# EAGLE board MainPSU (EAGLE 9.5.1)
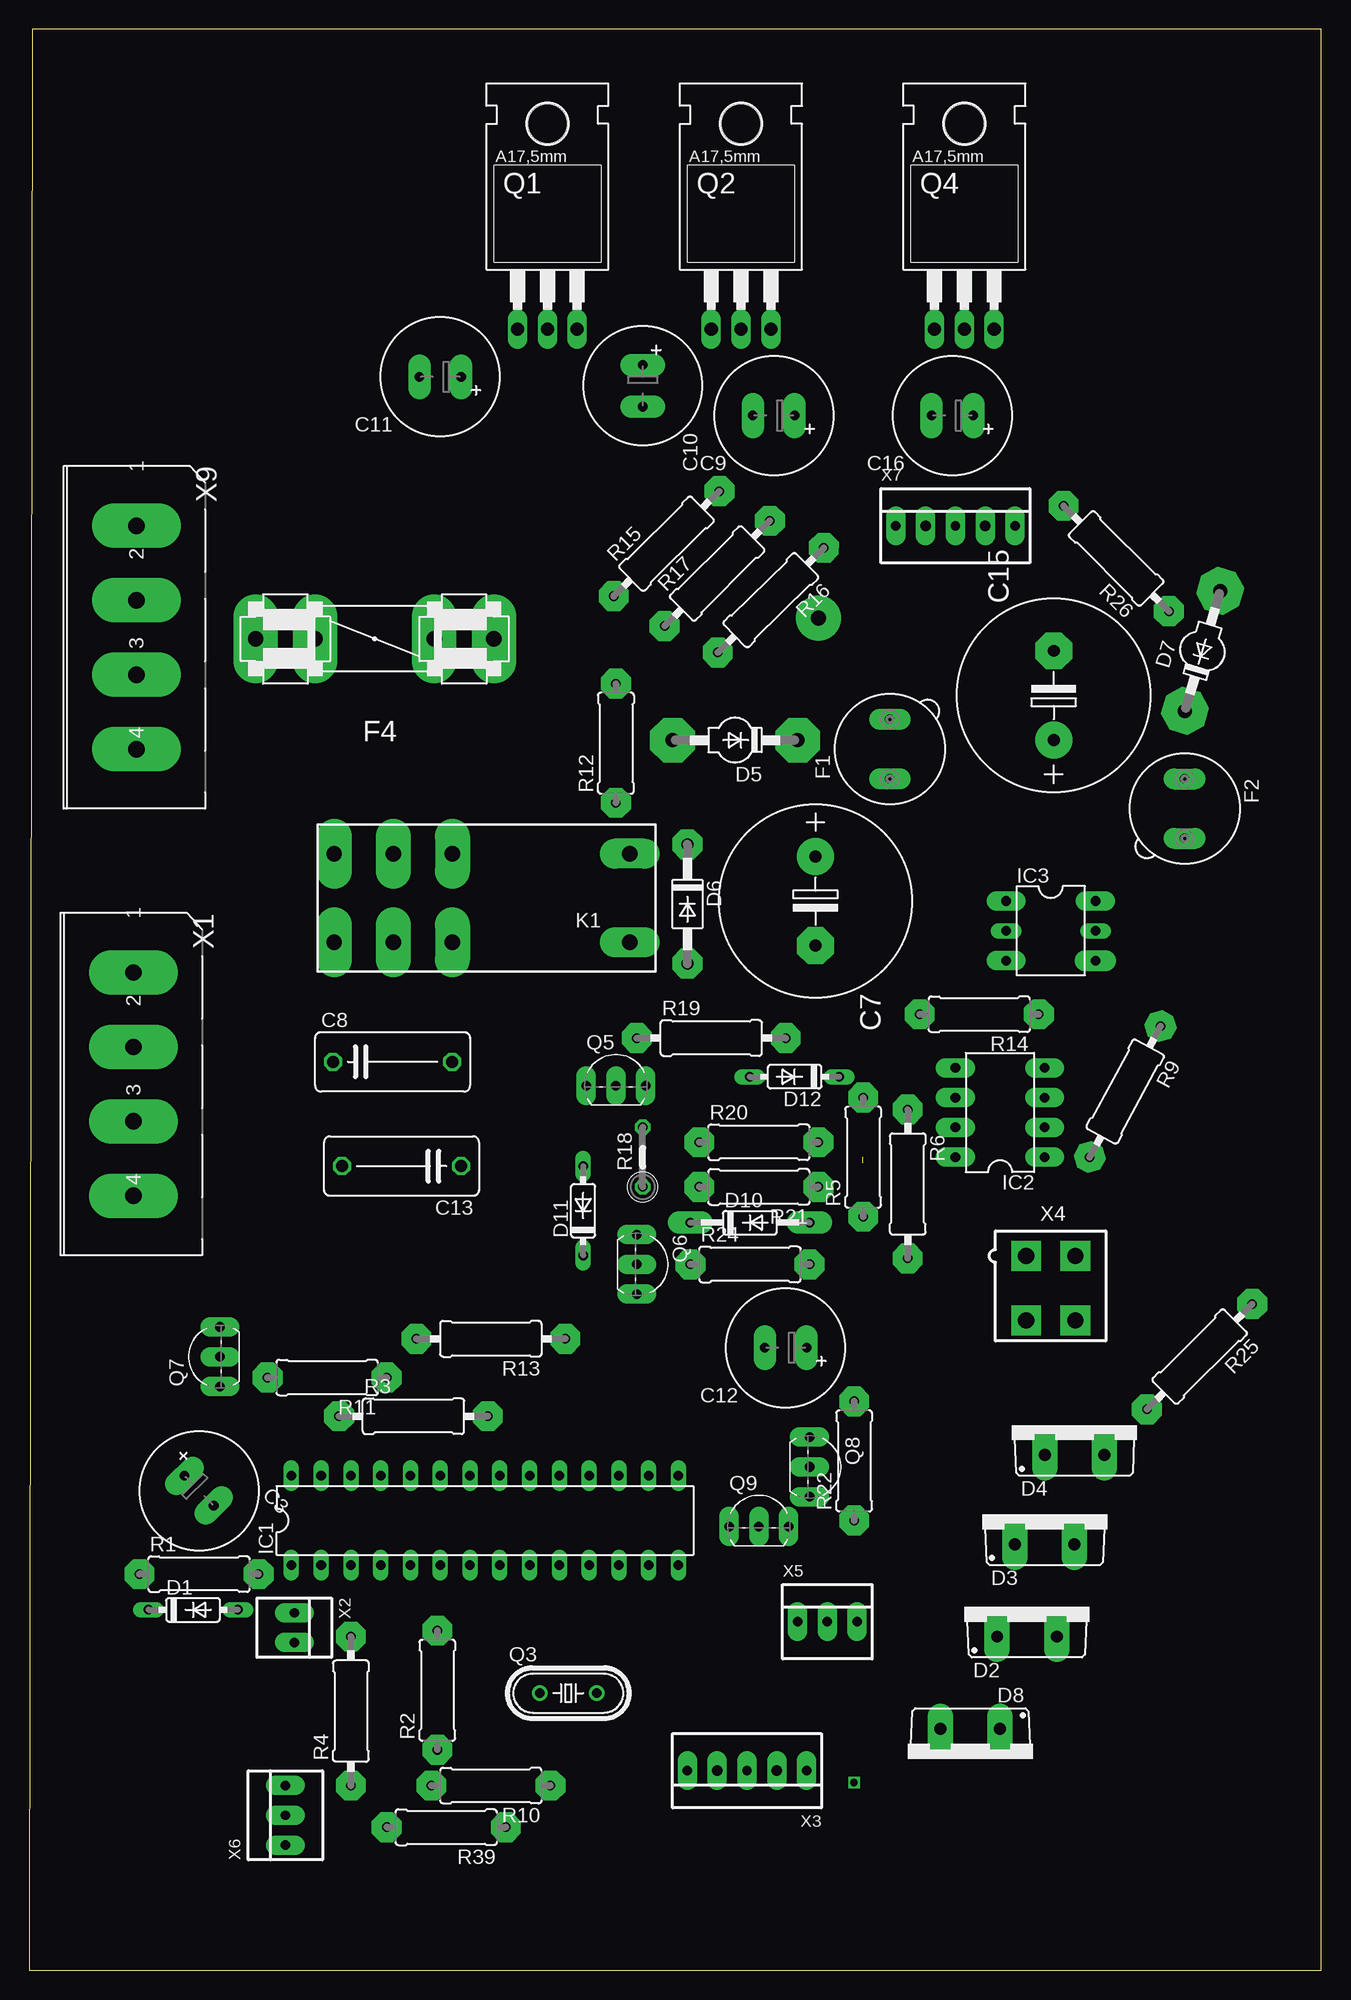
[diagram p0: board, top side]
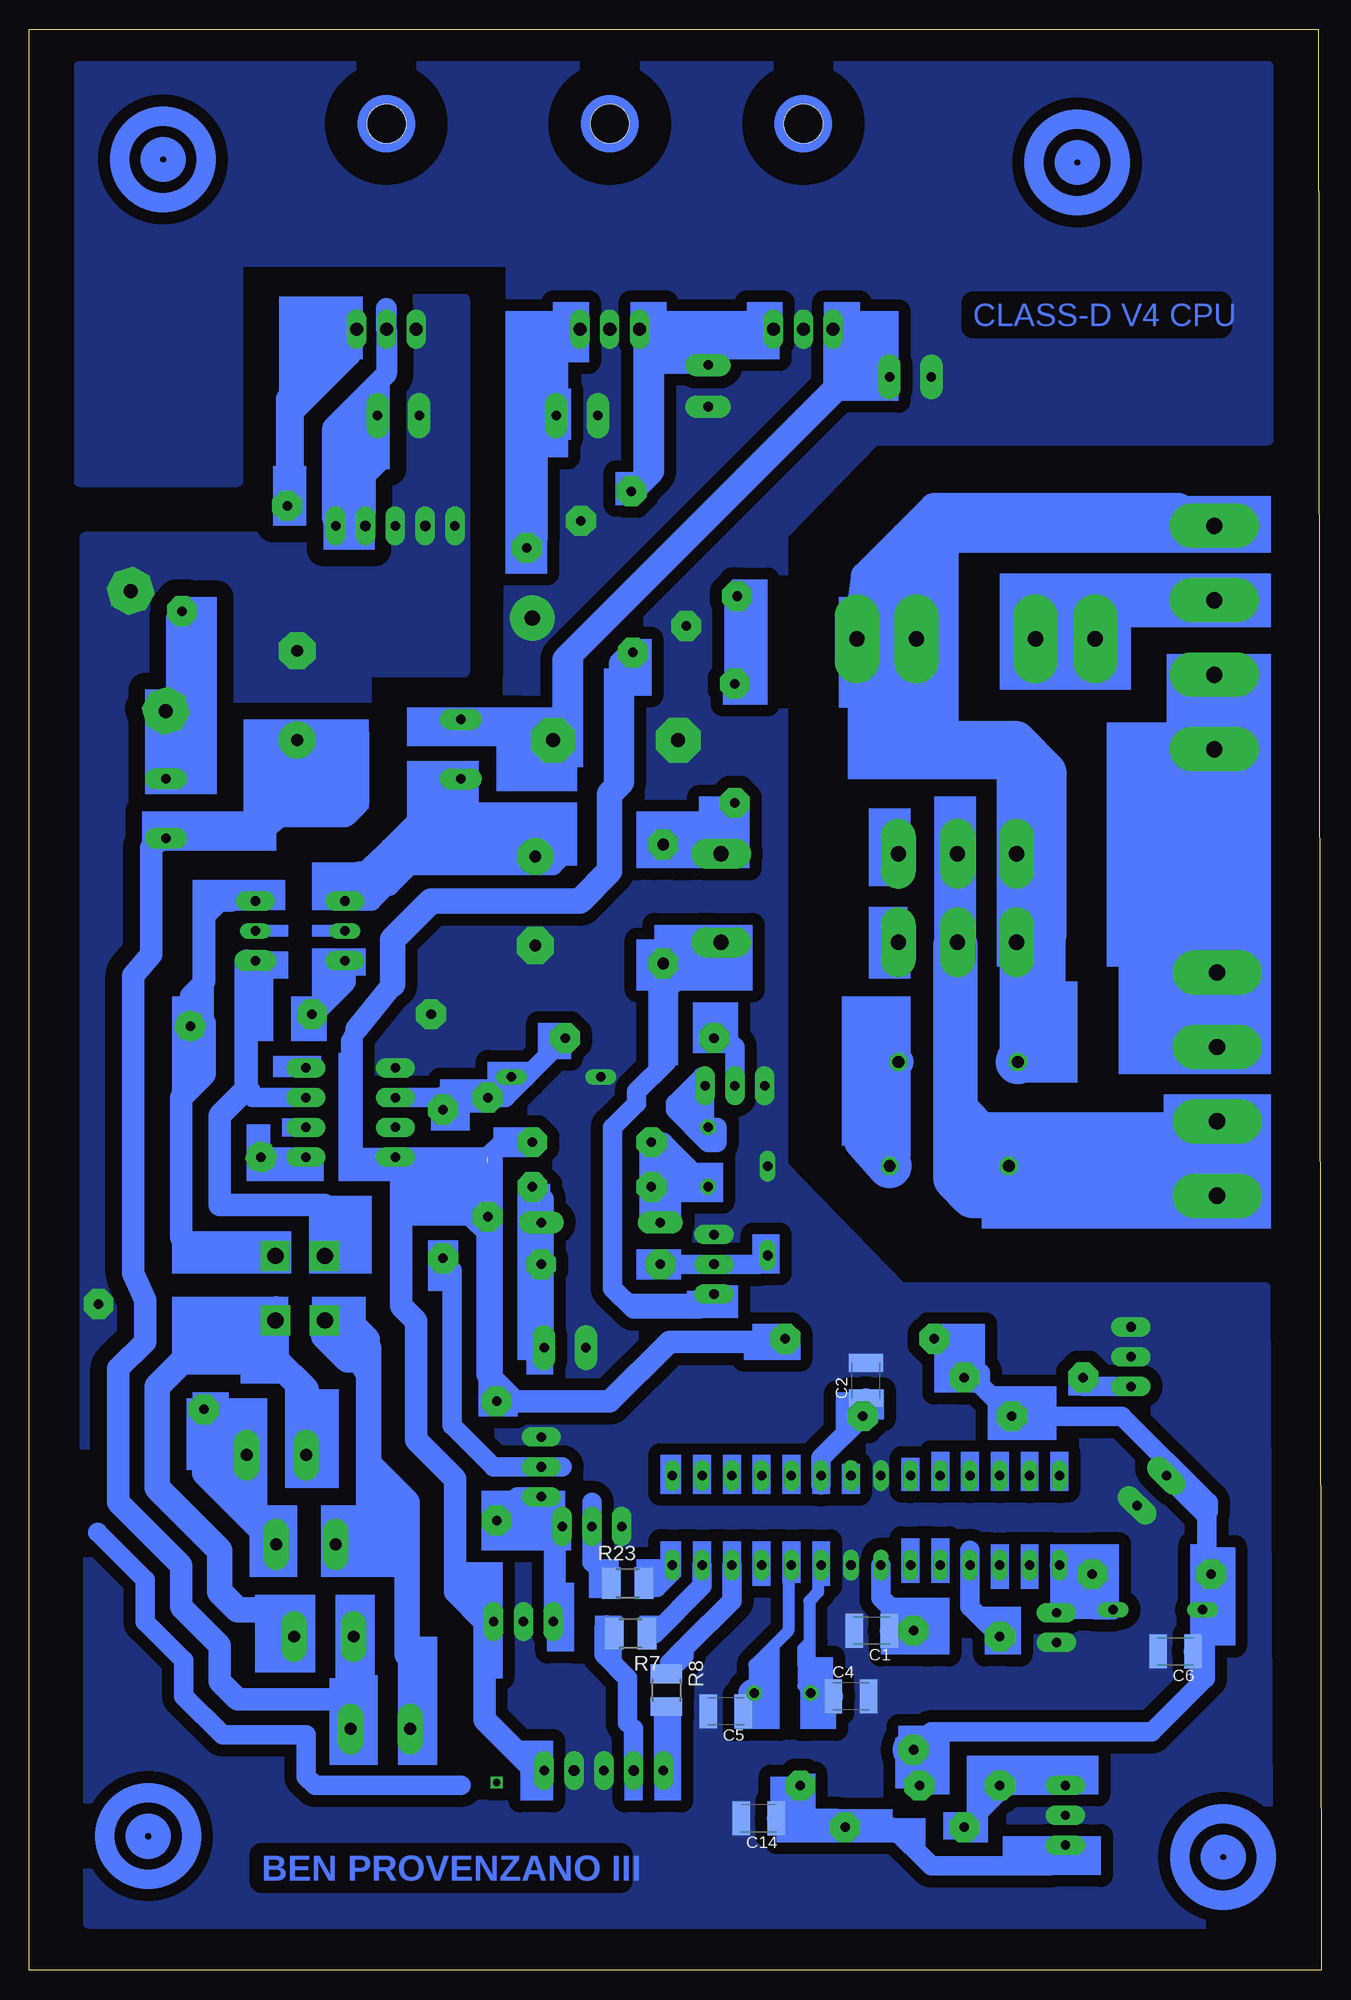
[diagram p1: board, bottom side, seen from below]

Size 110.22 x 165.53 mm. Coordinates in mm from the lower left corner, seen from the top.
Outline: 0,0 110.22,0 110.22,165.53 0.25,165.53 0,0
Copper layers (1*16): Top 0.035mm / dielectric 1.5mm / Bottom 0.035mm
Design rules "default": minimum track width 10mil, minimum drill 24mil, track to track 8mil, track to pad 8mil, pad to pad 8mil, via to via 8mil, smd to smd 8mil, copper to edge 40mil, drill to drill 8mil, minimum pad ring 10mil, minimum via ring 8mil, stop-mask expansion 4mil, vias tented up to drill 0mil, thermal gap 10mil

## Footprints (pad centres in the part's own frame; a part is rotated, then mirrored left to right if it is on the bottom)
C1210K = smd 1.5 x 2.9: 1 -1.5,0; 2 1.5,0
E3,5-10 = drill 0.813 pad 1.93 long: + -1.778,0; - 1.778,0
E7,5-16 = drill 1.016 pad 3.15: + -3.81,0 | drill 1.016 pad 3.15 octagon: - 3.81,0
C102-054X133 = drill 1.016 octagon: 1 -5.08,0; 2 5.08,0
DO35-7 = drill 0.813 long: A 3.81,0; C -3.81,0
DO220S = drill 1.016 pad 2.184 long: A 2.54,-2.54; C -2.54,-2.54
SOD57-10 = drill 1.194 pad 3.81 octagon: A 5.334,0; C -5.334,0
DO41-10 = drill 1 pad 2.54 octagon: A 5.08,0; C -5.08,0
DO35-10 = drill 0.813 pad 1.93 long: A 5.08,0; C -5.08,0
19560 = drill 0.813 pad 1.778 long: 1 -2.54,0; 2 2.54,0
FUSE1 = drill 1.3 pad 3.81 long: 1A -10.16,0; 1B -5.08,0; 2A 10.16,0; 2B 5.08,0
DIL28-3 = drill 0.813 long: 1 -16.51,-3.81; 2 -13.97,-3.81; 3 -11.43,-3.81; 4 -8.89,-3.81; 5 -6.35,-3.81; 6 -3.81,-3.81; 7 -1.27,-3.81; 8 1.27,-3.81; 9 3.81,-3.81; 10 6.35,-3.81; 11 8.89,-3.81; 12 11.43,-3.81; 13 13.97,-3.81; 14 16.51,-3.81; 15 16.51,3.81; 16 13.97,3.81; 17 11.43,3.81; 18 8.89,3.81; 19 6.35,3.81; 20 3.81,3.81; 21 1.27,3.81; 22 -1.27,3.81; 23 -3.81,3.81; 24 -6.35,3.81; 25 -8.89,3.81; 26 -11.43,3.81; 27 -13.97,3.81; 28 -16.51,3.81
DIL08 = drill 0.813 pad 1.676 long: 1 -3.81,-3.81; 2 -1.27,-3.81; 3 1.27,-3.81; 4 3.81,-3.81; 5 3.81,3.81; 6 1.27,3.81; 7 -1.27,3.81; 8 -3.81,3.81
DIL06 = drill 0.813 pad 1.676 long: 1 -2.54,-3.81; 3 2.54,-3.81; 6 -2.54,3.81 | drill 0.813 long: 2 0,-3.81; 5 0,3.81 | drill 0.813 pad 1.778 long: 4 2.54,3.81
RT-C/O16A5 = drill 1.3 pad 3 long: 11A 7.56,3.78; 11B 7.56,-3.78; 12A 2.52,3.78; 12B 2.52,-3.78; 14A 12.6,3.78; 14B 12.6,-3.78 | drill 1.3 pad 2.54 long: A1 -12.6,-3.78; A2 -12.6,3.78
TO220BH = drill 1.118 long: D 0,-6.35; G -2.54,-6.35; S 2.54,-6.35 | hole 3.302: 0,11.176
HC49/S = drill 0.813: 1 -2.413,0; 2 2.413,0
TO92-EBC = drill 0.813 pad 1.676 long: B 0,-1.27; C -2.54,-1.27; E 2.54,-1.27
0309/10 = drill 0.813 pad 2.54 octagon: 1 -5.08,0; 2 5.08,0
0309/12 = drill 0.813 pad 2.54 octagon: 1 -6.35,0; 2 6.35,0
R1210 = smd 1.6 x 2.7: 1 -1.4,0; 2 1.4,0
0207/5V = drill 0.813 octagon: 1 -2.54,0; 2 2.54,0
GMSTBA4 = drill 1.397 pad 3.81 long: 1 -8.89,5.08; 2 -2.54,5.08; 3 3.81,5.08; 4 10.16,5.08
22-23-2021 = drill 0.8 pad 1.676 long: 1 -1.27,0; 2 1.27,0
22-23-2051 = drill 0.8 pad 1.676 long: 1 -5.08,0; 3 0,0; 5 5.08,0 | drill 0.9 pad 1.676 long: 2 -2.54,0; 4 2.54,0
5566-4 = drill 1.4 pad 2.54 square: 1 2.1,-2.75; 2 -2.1,-2.75; 3 2.1,2.75; 4 -2.1,2.75
22-23-2031 = drill 0.8 pad 1.676 long: 1 -2.54,0; 2 0,0; 3 2.54,0

## Placement (x,y rotation side)
C1  .1  [C1210K]  38.35,28.96 180 bottom
C2  .1  [C1210K]  38.86,50.29 90 bottom
C3  330uF  [E3,5-10]  14.48,40.89 314.6 top
C4  22pF  [C1210K]  40.13,23.37 0 bottom
C5  22pF  [C1210K]  50.8,22.1 180 bottom
C6  .1  [C1210K]  12.45,27.18 180 bottom
C7  1800uF  [E7,5-16]  67.06,91.19 270 top
C8  NTC-10  [C102-054X133]  30.99,77.47 0 top
C9  100uF  [E3,5-10]  63.5,132.59 180 top
C10  100uF  [E3,5-10]  52.32,135.13 270 top
C11  10uF  [E3,5-10]  35.05,135.89 180 top
C12  100uF  [E3,5-10]  64.52,53.09 180 top
C13  NTC-10  [C102-054X133]  31.75,68.58 180 top
C14  .1  [C1210K]  48.01,12.95 180 bottom
C15  3300uF  [E7,5-16]  87.38,108.71 90 top
C16  100uF  [E3,5-10]  78.74,132.59 180 top
D1  4148  [DO35-7]  13.97,30.73 0 top
D2  BYW29  [DO220S]  85.09,30.99 0 top
D3  BYW29  [DO220S]  86.61,38.86 0 top
D4  BYW29  [DO220S]  89.15,46.48 0 top
D5  TVS27V  [SOD57-10]  60.2,104.9 180 top
D6  4007  [DO41-10]  56.13,90.93 270 top
D7  TVS20V  [SOD57-10]  100.08,112.52 73.6 top
D8  BYW29  [DO220S]  80.26,18.03 180 top
D10  4148  [DO35-10]  61.47,63.75 0 top
D11  15v  [DO35-7]  47.24,64.77 90 top
D12  15v  [DO35-7]  65.28,76.2 180 top
F1  800mA  [19560]  73.41,104.14 90 top
F2  2A  [19560]  98.55,99.06 270 top
F4  250mA  [FUSE1]  29.46,113.54 180 top
IC1  ATmega328p  [DIL28-3]  38.86,38.35 0 top
IC2  MID400  [DIL08]  82.8,73.15 90 top
IC3  DF10M  [DIL06]  87.12,88.65 270 top
K1  ALZ11B12  [RT-C/O16A5]  38.61,91.44 180 top
Q1  7812  [TO220BH]  44.2,146.3 0 top
Q2  7805  [TO220BH]  60.71,146.3 0 top
Q3  16MHz  [HC49/S]  45.97,23.62 0 top
Q4  1084-12  [TO220BH]  79.76,146.3 0 top
Q5  ZVN2106  [TO92-EBC]  50.04,76.71 0 top
Q6  ZVN2106  [TO92-EBC]  53.09,60.2 270 top
Q7  3LED  [TO92-EBC]  14.99,52.32 90 top
Q8  ZVN2106  [TO92-EBC]  67.82,42.93 270 top
Q9  ZVN2106  [TO92-EBC]  62.23,39.12 0 top
R1  10K  [0309/10]  14.48,33.78 0 top
R2  BEAD  [0309/10]  34.8,23.88 90 top
R3  BEAD  [0309/12]  32.77,47.24 0 top
R4  220  [0309/12]  27.43,22.1 90 top
R5  330  [0309/10]  71.12,69.34 90 top
R6  1k1  [0309/12]  74.93,67.06 270 top
R7  1k  [R1210]  58.93,28.7 180 bottom
R8  1k  [R1210]  55.88,23.88 270 bottom
R9  2k2  [0309/12]  93.47,74.93 241.6 top
R10  BEAD  [0309/10]  39.37,15.75 180 top
R11  1k1  [0309/10]  25.4,50.55 180 top
R12  0  [0309/10]  50.04,104.65 90 top
R13  0  [0309/12]  39.37,53.85 180 top
R14  0  [0309/10]  81.03,81.53 180 top
R15  0  [0309/12]  54.36,121.67 44.8 top
R16  0  [0309/12]  63.25,116.84 224.6 top
R17  0  [0309/12]  58.67,119.13 45 top
R18  10  [0207/5V]  52.32,69.34 90 top
R19  1k1  [0309/12]  58.17,79.5 0 top
R20  1k1  [0309/10]  62.23,70.61 0 top
R21  69k  [0309/10]  62.23,66.8 180 top
R22  4k7  [0309/10]  70.36,43.43 90 top
R23  1k1  [R1210]  59.18,33.02 0 bottom
R24  220  [0309/10]  61.47,60.2 0 top
R25  0  [0309/12]  99.82,52.32 225 top
R26  0  [0309/12]  92.71,120.4 135 top
R39  47k  [0309/10]  35.56,12.19 180 top
X1  AC  [GMSTBA4]  3.81,76.2 270 top
X2  RESET  [22-23-2021]  22.61,29.21 270 top
X3  VOL  [22-23-2051]  61.21,17.02 180 top
X4  XFMR_AC  [5566-4]  87.12,58.17 180 top
X5  PROT  [22-23-2031]  68.07,29.72 0 top
X6  IR_IN  [22-23-2031]  21.84,13.21 90 top
X7  BIAS  [22-23-2051]  78.99,123.19 0 top
X9  AC  [GMSTBA4]  4.06,114.3 270 top

## Library data of the parts
C1-C16 R1-R26 R39 = resistor
D1-D8 D10-D12 = diode
F1 F2 = fuse; MPN: 56000001009; OC_FARNELL: 1185363; OC_NEWARK: 15P8392
F4 = special
IC1-IC3 = ic-package
K1 = relay; MPN: RT314730; OC_FARNELL: 1629051; OC_NEWARK: 03P2424
Q1 Q2 Q4 = transistor-power
Q3 = crystal; OC_FARNELL: 1667008; OC_NEWARK: unknown
Q5-Q9 = transistor-npn
X1 X9 = con-phoenix-762; MF: FARNELL; MPN: 1757268; OC_FARNELL: 3705195; OC_NEWARK: 71C4163
X2 = con-molex; MF: MOLEX; MPN: 22-23-2021; OC_FARNELL: 1462926; OC_NEWARK: 25C3832
X3 X7 = con-molex; MF: MOLEX; MPN: 22-23-2051; OC_FARNELL: 1462952; OC_NEWARK: 38C9178
X4 = con-molex; OC_FARNELL: unknown; OC_NEWARK: unknown
X5 X6 = con-molex; MF: MOLEX; MPN: 22-23-2031; OC_FARNELL: 1462950; OC_NEWARK: 30C0862

## Nets
DGND: C15.- C16.- D7.A Q4.G R25.1 X7.1 X7.2 X7.3
GND: C1.2 C2.2 C3.- C4.2 C5.2 C6.2 C7.- C9.- C10.- C11.- C12.- C14.2 D5.A D11.A D12.A IC1.8 IC1.22 IC2.5 Q1.D Q2.D Q5.C Q6.C Q7.B Q7.E Q8.C Q9.C R14.2 R17.1 R17.2 X2.2 X3.2 X3.3 X5.2 X6.2
N$1: Q8.B R6.2
N$2: D1.A IC1.1 R1.2 X2.1
N$3: IC1.4 R4.2
N$4: C2.1 IC1.20 R3.2
N$5: R4.1 R39.2 X6.3
N$7: IC1.13 R7.1
N$8: IC1.12 R8.1
N$9: C11.+ D5.C F1.2 Q1.G
N$10: C8.2 C13.1
N$11: D6.C K1.A1 R12.1
N$12: IC3.6 R9.1 X4.2
N$13: C4.1 IC1.9 Q3.1
N$14: C5.1 IC1.10 Q3.2
N$15: X1.1 X1.2 X9.3 X9.4
N$16: D12.C IC2.6 R5.2 R6.1 R19.2
N$17: IC2.1 R9.2
N$18: Q8.E Q9.E R22.1 X5.1
N$19: IC3.3 R14.1
N$20: C14.1 R10.1 R39.1 X6.1
N$21: F4.2A X9.2
N$22: Q7.C R11.2
N$24: C8.1 F4.1A K1.14A K1.14B X9.1
N$25: C13.2 K1.11A K1.11B X1.3 X1.4
N$26: C9.+ Q2.S R16.1
N$28: C10.+ Q1.S Q2.G R15.2
N$29: R12.2 R15.1
N$30: C7.+ F1.1 IC3.1
N$32: C3.+ C6.1 D1.C R1.1 R2.1 R3.1 R10.2 R11.1 R13.2
N$33: D3.C D8.A X4.3
N$34: D2.A D4.C X4.4
N$35: C1.1 IC1.7 R2.2
N$36: IC2.8 R5.1 R13.1 R16.2 R20.2 R22.2 X3.1 X5.3
N$37: IC2.3 IC3.4 X4.1
N$38: Q5.B R19.1
N$39: D10.C R18.1 R20.1 R21.2
N$40: C12.+ D10.A R21.1 R24.2
N$41: IC1.14 R23.2
N$42: D6.A K1.A2 Q6.E
N$43: D11.C Q6.B R24.1
N$44: Q9.B R23.1
N$45: R8.2 X3.5
N$46: R7.2 X3.4
N$47: D3.A D4.A R25.2
N$48: C15.+ D2.C D8.C F2.2
N$49: D7.C F2.1 R26.1
N$52: Q4.S R26.2
N$53: Q5.E R18.2
N$56: C16.+ Q4.D X7.4 X7.5

## Tracks (layer width: path | path; a pad name or v marks a point on that pad's centre or on a via)
DGND
  pour Bottom (isolate 1.422, no thermals): 81.03,44.7 105.41,44.7 105.41,122.17 89.41,122.17 89.41,142.49 73.15,142.49 73.15,110.74 81.53,110.74 81.53,100.58 84.07,97.28 93.22,97.28 95.25,91.44 95.25,65.02 86.87,63.25 90.17,55.88 82.55,51.05 82.04,45.72
GND  (via drill 1.3 pad 3.81)
  other vias: 67.31,115.32
  pour Bottom (isolate 1.016, no thermals): 4.83,58.17 35.81,58.17 45.97,68.58 45.97,122.43 38.1,130.56 4.57,130.56 4.57,162.31 105.92,162.31 105.92,127 92.46,127 92.46,145.8 69.09,145.8 69.34,107.19 84.07,95 84.33,94.23 87.12,41.66 105.16,41.66 105.16,4.06 4.57,4.06
N$1
  Bottom 1.676: R6.2 74.17,59.69 74.17,46.48 70.61,42.93 Q8.B 64.77,42.93
N$2
  Bottom 1.676: R1.2 20.32,34.54 21.59,34.54 | 21.59,34.54 IC1.1 | X2.1 21.59,30.99 21.59,33.02 | 21.59,33.02 21.59,34.54 | D1.A 19.3,30.73 21.59,33.02
N$3
  Bottom 1.676: R4.2 29.97,30.99 IC1.4 29.97,35.81
N$4
  Bottom 1.676: 42.67,41.4 IC1.20 42.67,43.69 R3.2 C2.1
N$5
  Bottom 1.676: R39.2 27.3,15.37 | 27.3,15.37 26.92,15.75 X6.3 | R4.1 27.3,15.62 27.3,15.37
N$6
  Bottom 1.676: 9.91,34.29 9.91,34.54
N$7
  Bottom 1.676: IC1.13 52.83,32.77 56.9,28.7 R7.1
N$8
  Bottom 1.422: 54.1,27.69 54.36,27.43
  Bottom 1.676: IC1.12 50.29,31.5 54.1,27.69 | 55.63,26.16 54.36,27.43 54.36,26.8 R8.1
N$9
  Bottom 1.676: F1.2 65.53,106.43 64.77,106.43 64.52,106.17 | C11.+ 41.15,136.4 41.66,136.91 Q1.G 41.66,134.62 | D5.C 65.53,105.41
  Bottom 2.184: 41.66,134.62 64.52,111.76 64.52,106.17 | 65.02,105.41 65.53,105.41 65.53,106.43
N$10
  Bottom 1.676: 39.37,76.2 38.86,75.69 38.86,70.87
  Bottom 2.54: C8.2 39.37,76.2
  Bottom 3.81: 38.86,70.87 C13.1
N$11
  Bottom 1.676: 56.13,97.54 D6.C 51.49,95.5 K1.A1 51.21,98.4 R12.1
N$12
  Bottom 1.676: 92.96,91.19 IC3.6
  Bottom 1.778: R9.1 96.49,83.09 95.25,84.33 95.25,89.92 93.98,91.19 92.96,91.19
  Bottom 1.93: 95.25,77.98 95.25,80.77 95.51,80.52 R9.1 95.25,78.77 95.25,76.45 97.28,74.42 97.28,62.48 95.71,60.92 X4.2 89.15,60.92 89.15,61.98
N$13
  Bottom 1.016: IC1.9 42.93,34.29 42.93,32.26 43.69,31.5 43.69,27.94 44.2,27.43 44.2,24.26 Q3.1
  Bottom 1.676: 43.69,23.9 C4.1 43.41,23.47 Q3.1
N$14
  Bottom 1.016: IC1.10 45.47,34.54 45.47,28.96 48.37,26.06 48.37,23.12 | 46.74,25.27 Q3.2 | C5.1 48.34,21.4 48.34,22.61
  Bottom 1.676: Q3.2 48.37,23.12 48.34,22.61
N$15
  Bottom 1.676: X9.3 X9.4 | X9.4 8.89,102.11 9.14,101.85 X9.4 | X1.2 X1.1 X9.4
N$16
  Bottom 1.676: IC2.6 74.93,74.42 R5.2 69.6,74.42 67.94,76.07 | R19.2 67.94,76.07 | D12.C 68.96,76.07 67.94,76.07
  Bottom 1.93: R6.1 74.93,74.42
N$17
  Bottom 1.676: IC2.1 R9.2
N$18
  Bottom 1.676: 66.29,40.13 Q8.E 68.58,40.39 R22.1 70.1,37.85 65.28,37.85 | Q9.E 65.28,37.85 | X5.1 65.28,29.97 65.28,37.85
N$19
  Bottom 1.93: IC3.3 83.31,84.33 R14.1
N$20
  Bottom 1.676: 44.45,12.95 41.4,12.95 R39.1 36.58,12.19 33.27,8.89 23.11,8.89 X6.1 | 44.45,12.95 C14.1 | R10.1 44.45,12.95
N$21
  Bottom 3.81: F4.2A 20.32,113.54 | 24.38,113.54 20.32,113.54 | 20.32,113.54 17.02,116.84 X9.2
N$22
  Bottom 1.676: Q7.C 20.32,49.78 R11.2
N$24
  Bottom 1.676: 23.62,88.39 22.71,89 25.45,87.89 K1.14A | K1.14B 22.61,96.9 22.61,96.77 23.62,100.08
  Bottom 2.54: 10.92,123.44 12.19,124.71 33.02,124.71 38.86,118.87 F4.1A
  Bottom 3.81: X9.1 10.92,123.44 | 35.05,119.13 35.05,113.79 | 35.05,113.79 35.05,107.95 31.75,104.65 26.16,104.65 23.62,102.11 23.62,100.08 23.62,88.39 | F4.1A 38.61,113.79 35.05,113.79 | C8.1 23.88,81.53 23.88,87.12 25.15,88.39 25.65,88.39 25.45,88.19 25.45,87.89
N$25
  Bottom 2.184: K1.11B K1.11A 31.24,90.14 31.24,87.38
  Bottom 2.54: X1.3 X1.4
  Bottom 3.81: 31.24,87.38 31.24,73.41 | 31.24,73.41 31.24,67.56 29.72,66.04 X1.4 | C13.2 31.24,73.41
N$26
  Bottom 1.676: Q2.S 66.8,136.4 66.8,132.84 | 66.8,132.84 66.8,122.17 67.68,121.3 R16.1 | C9.+ 65.28,132.84 66.8,132.84
N$28
  Bottom 1.676: Q1.S 52.32,139.95 | 52.32,139.95 53.09,139.95 Q2.G | C10.+ 52.32,139.95
  Bottom 2.184: R15.2 57.15,127.85 57.15,137.67 54.86,139.95 53.09,139.95
N$29
  Bottom 2.184: R12.2 49.85,109.92 R15.1
N$30
  Bottom 1.676: 80.26,95 C7.+ 67.82,95.25 64.52,95.25 65.53,94.23 77.72,94.23 79.5,92.46 | 81.41,93.85 80.26,95 | 79.5,95.76 74.17,101.09 F1.1 | 80.26,95 79.5,95.76 | 79.5,95.76 78.23,95.76 | 78.23,95.76 77.98,96.01 | 78.23,95.76 81.28,92.71 83.31,92.71 IC3.1 | IC3.1 82.04,93.73 81.03,93.73 | IC3.1 81.03,91.19 79.5,92.71
N$32
  Bottom 1.676: R10.2 R2.1 33.27,20.32 14.48,20.32 9.91,24.89 9.91,26.92 | 9.91,26.92 9.91,33.27 | 9.91,33.27 9.78,33.4 | C6.1 10.16,27.18 9.91,26.92 | D1.C 10.16,33.02 9.91,33.27 | 9.78,33.4 R1.1 | 9.78,33.4 9.78,38.71 C3.+ 9.93,38.86 9.91,38.86 9.65,39.12 9.65,39.88 17.02,47.24 R3.1 29.08,49.91 | 29.08,49.91 29.72,50.55 R11.1 | R13.2 29.08,50.93 29.08,49.91
N$33
  Bottom 1.93: 81.28,53.09 81.28,53.85 82.8,55.37 84.33,55.37 84.37,55.42 X4.3
  Bottom 2.184: D8.A 77.22,22.35 77.22,26.16 77.98,26.92 77.98,39.88 81.28,43.18 | 81.28,43.18 81.28,50.8 | 81.28,50.8 81.28,53.09 | 85.02,55.3 X4.3 | 81.28,50.8 82.04,52.07 83.06,52.07 85.09,54.1 85.09,55.37 | 81.28,43.18 81.28,39.12 D3.C
N$34
  Bottom 2.184: X4.4 89.15,54.98 | 89.15,54.98 89.15,56.39 | 89.15,54.98 89.15,52.07 86.61,49.53 86.61,49.28 | D2.A 89.92,30.73 92.46,30.73 93.98,32.26 93.98,35.81 99.31,41.15 99.31,49.78 96.77,52.32 89.66,52.32 86.61,49.28 | D4.C 86.61,49.28
N$35
  Bottom 1.676: C1.1 R2.2 | 33,28.96 R2.2 | R2.2 37.59,31.75 IC1.7
N$36  (1 unrouted)
  Bottom 1.676: R20.2 69.85,70.61 71.12,69.34 IC2.8 | R5.1 71.12,68.83 78.49,68.83 80.26,68.83 80.52,68.58 80.52,68.33 82.04,68.33 82.8,69.09 82.8,79.25 82.3,80.26 82.04,80.52 | R22.2 69.72,49.4 | X3.1 67.06,17.02 | X5.3 70.87,29.46 71.37,29.46
  Bottom 1.93: R13.1 45.97,53.59 55.63,53.59 60.71,48.51 68.83,48.51 69.72,49.4 71.12,50.8 71.12,62.99 72.39,64.26 R5.1 | 79.25,84.07 82.3,80.26 | 67.06,17.02 71.37,21.34 71.37,29.46 71.37,29.72 73.91,32.26 73.91,41.91 77.22,45.21 77.22,55.37 78.49,56.64 78.49,68.83
  Bottom 2.184: R16.2 59.69,111.42 59.69,101.35 60.71,100.33 60.71,93.73 63.25,91.19 75.95,91.19 79.25,87.88 79.25,84.07
N$37
  Bottom 1.676: IC2.3 91.19,74.42 91.19,74.68 91.44,74.93 | IC3.4 91.44,85.85 91.44,86.11 91.69,86.11
  Bottom 1.93: 91.69,75.18 93.98,72.9 93.98,65.28 85.02,65.28 X4.1 | 91.69,75.18 91.69,86.11 | 91.44,74.93 91.69,75.18
N$38
  Bottom 1.676: R19.1 50.8,79.5 50.04,78.74 Q5.B
N$39
  Bottom 1.676: R20.1 57.15,70.1 | 57.15,70.1 57.15,68.07 | 57.15,68.07 R21.2 57.15,64.52 D10.C | 54.61,68.07 57.15,68.07 | 57.15,70.1 56.39,70.1 56.9,70.61 56.13,70.61 R18.1 53.34,66.8
N$40
  Bottom 1.676: R21.1 66.29,65.79 66.29,64.01 | 66.29,64.01 66.29,60.2 | 66.29,60.2 C12.+ | R24.2 66.29,60.2 | D10.A 66.29,64.01
N$41
  Bottom 1.422: 57.4,32.51 56.64,32.51 55.37,33.78 IC1.14
  Bottom 1.676: 57.4,32.51 57.78,32.89 R23.2
N$42
  Bottom 1.676: Q6.E 53.09,56.39 58.67,56.39 60.45,58.17 60.45,71.88 58.42,73.91 58.42,74.93 55.88,77.47 D6.A | D6.A 54.86,87.88 50.8,88.14 50.83,87.66 K1.A2 | 55.37,84.07 D6.A
N$43
  Bottom 1.676: R24.1 Q6.B 48.01,60.2 D11.C
N$44
  Bottom 1.676: R23.1 60.58,33.15 62.23,34.8 Q9.B 62.23,39.88
N$45
  Bottom 1.676: X3.5 56.13,22.48 R8.2
N$46
  Bottom 1.676: X3.4 58.67,20.57 59.18,21.08 59.18,24.89 61.21,26.92 61.21,29.21 60.96,29.46 60.96,29.33 R7.2
N$47
  Bottom 2.184: R25.2 91.69,44.37 D4.A 93.47,45.72 95.5,45.72 95.25,45.47 95.25,42.42 D3.A
N$48
  Bottom 1.676: 83.57,23.62 83.54,23.59 82.6,23.59
  Bottom 1.93: D2.C 82.55,23.11 92.46,23.11 93.98,24.64 93.98,27.69 97.28,30.99 97.28,34.54 102.62,39.88 102.62,51.31 100.33,53.59 100.33,57.15 101.35,59.44 101.35,84.84 99.82,86.61 99.82,95.76 98.04,97.28 F2.2 93.98,97.03
  Bottom 2.184: D8.C 82.6,23.59 82.55,24.38 D2.C | C15.+ 86.23,104.78 | 86.23,104.78 86.36,104.9 | 93.98,97.03 90.68,97.03 88.9,98.55 83.31,98.55 82.3,99.57 82.3,105.41 83.44,105.28 86.23,104.78
N$49
  Bottom 1.93: F2.1 98.55,106.43 D7.C 98.3,108.21 97.28,109.22 97.28,115.06 R26.1
N$50
  Bottom 1.676: 73.41,15.75 85.85,15.75 86.61,16.51 86.61,20.07 93.73,20.07 97.03,23.37 97.03,26.42 100.33,29.72 100.33,33.27 104.39,37.34
N$51  (via drill 0.6)
  other vias: 70.36,16
N$52
  Bottom 1.676: Q4.S 82.8,139.45 82.8,137.67 87.63,132.84 87.63,127.76 88.22,127.76
  Bottom 1.93: 88.22,134.03 88.22,127.76 R26.2
N$53
  Bottom 1.676: R18.2 51.56,71.88 51.56,70.61 52.32,70.61 55.12,73.41 55.12,73.91 52.83,76.2 52.83,75.69 Q5.E
N$56
  Bottom 1.778: X7.4 81.53,127.51 80.52,128.52 C16.+ 80.52,135.38 | 79.76,141.73 Q4.D 79.76,136.14 80.52,135.38 | X7.5 84.33,123.7 84.33,131.57 80.52,135.38
(copper drawn outside any net)
  shapes: Bottom area x464, Bottom circle x16

## Text on the board
Bottom: CLASS-D V4 CPU | BEN PROVENZANO III